# Altium PCB MainShunt.PcbDoc
Units mm, origin at the board's own origin, x right, y up, seen from the top; angles counter-clockwise.
Board outline 74.99 x 50.01 mm, 4 copper layers (Top Layer, Layer 1, Layer 2, Bottom Layer), stack 0.637 mm thick; 43 components, 38 nets, 202 pads, 18 vias.
Unrouted connection lines stored in the file: 58.
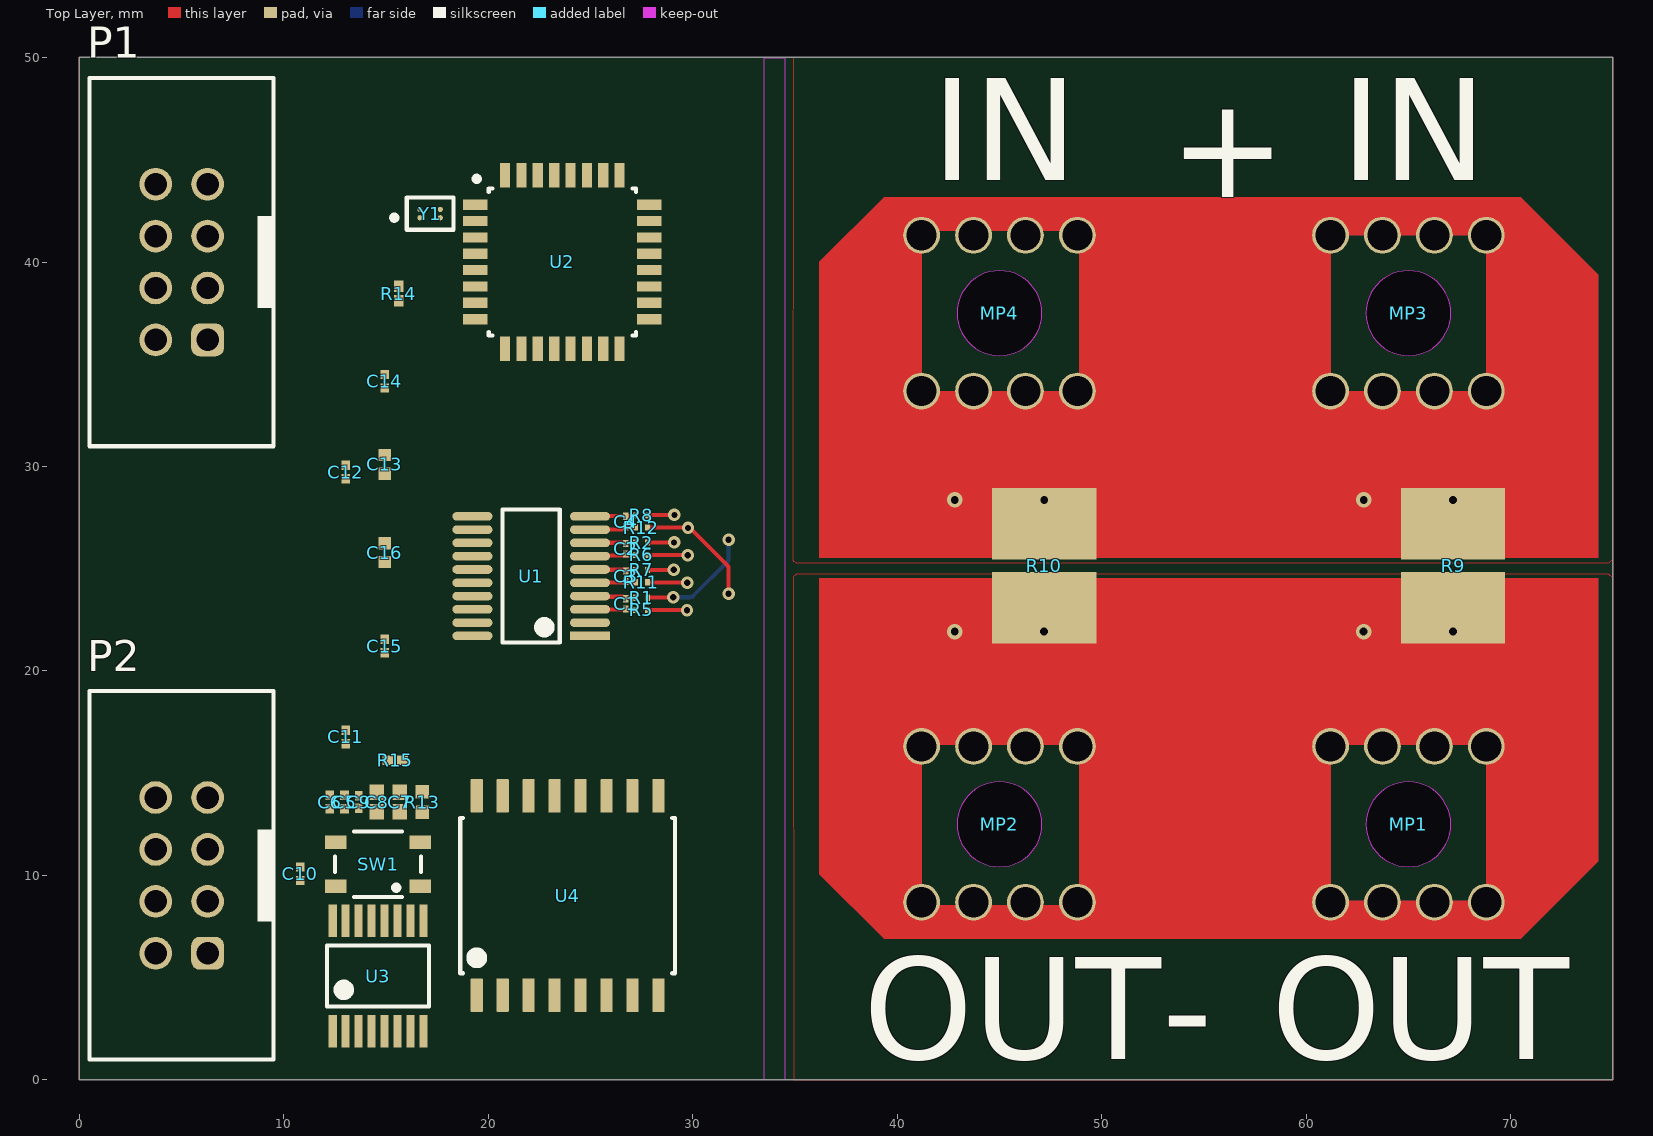
[diagram p0: Top Layer view]
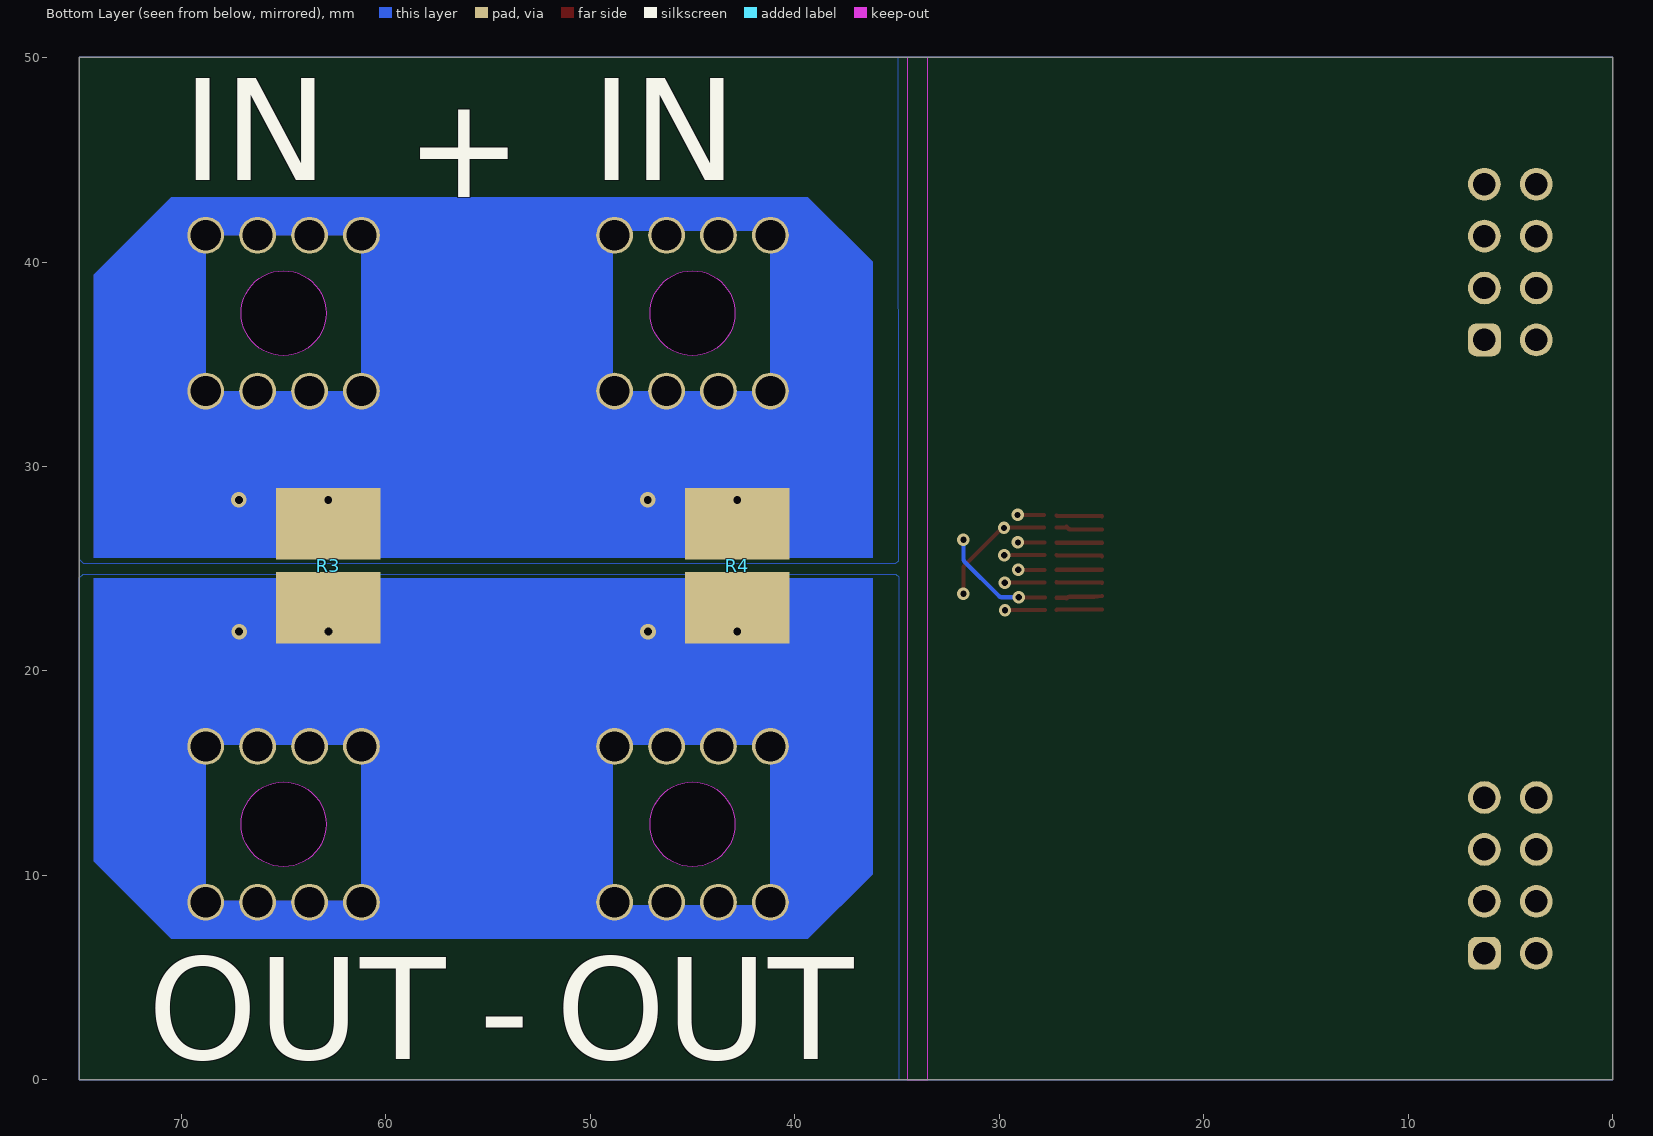
[diagram p1: Bottom Layer view, seen from below]
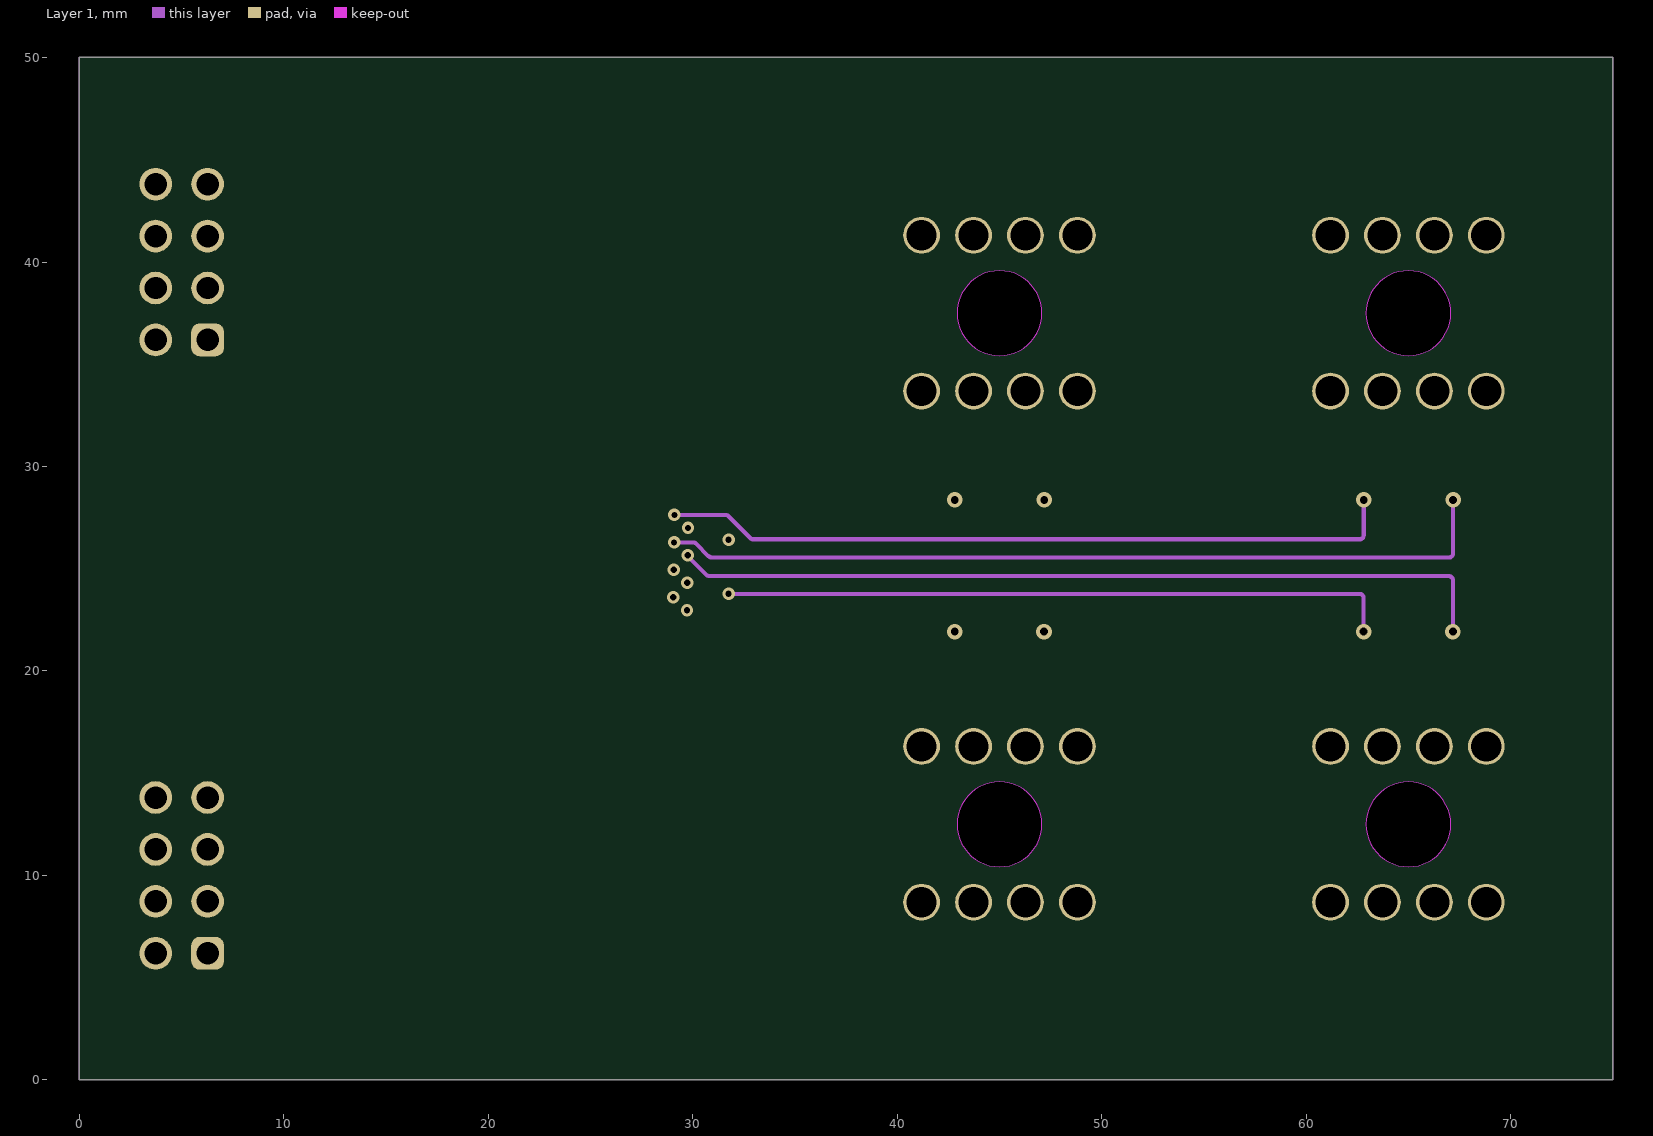
[diagram p2: Layer 1]
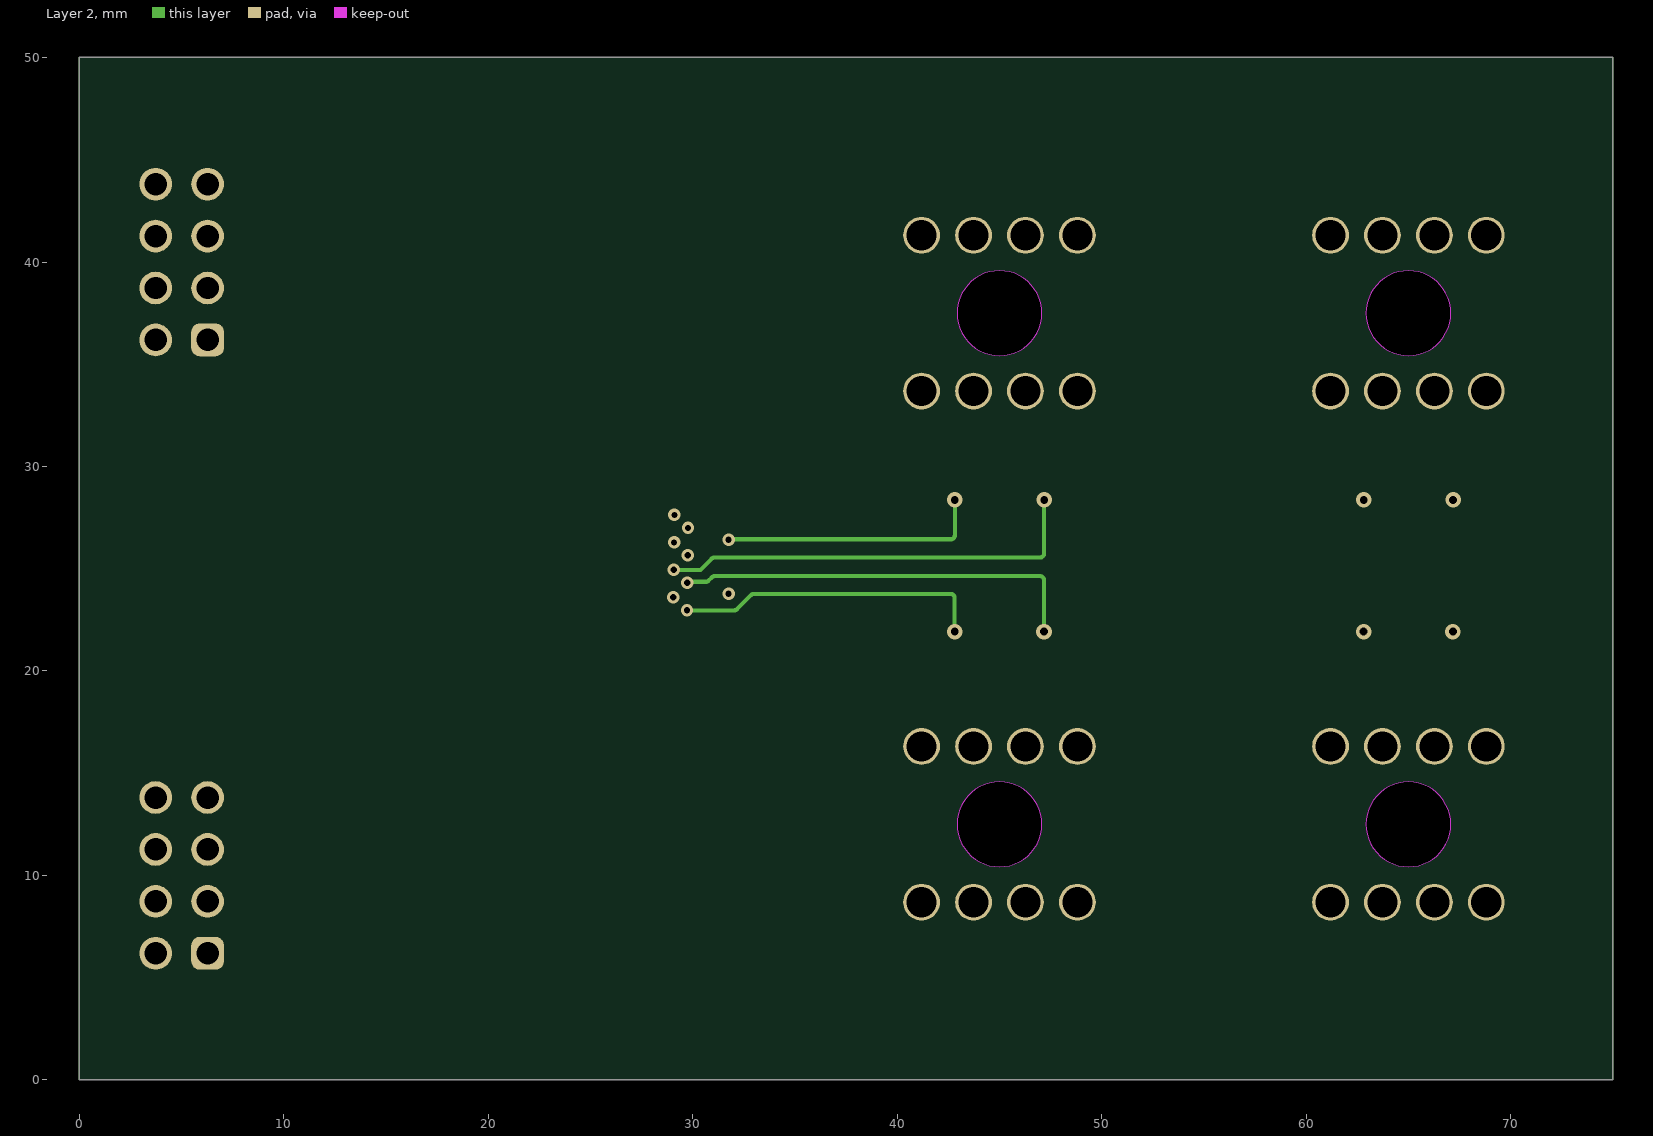
[diagram p3: Layer 2]

## Layer stack, top to bottom
Top Solder: solder mask 0.0102, Solder Resist, Dk 3.5
Top Layer: signal copper 0.07
Dielectric 2: prepreg 0.0711, PP-006, Dk 4.1
Layer 1: signal copper 0.0175
Dielectric 1: dielectric 0.32, FR-4, Dk 4.8
Layer 2: signal copper 0.0175
Dielectric 3: prepreg 0.0711, PP-006, Dk 4.1
Bottom Layer: signal copper 0.07
Bottom Solder: solder mask 0.0102, Solder Resist, Dk 3.5

## Board outline
0,0 74.986,0 74.986,50.005 0,50.005
cut-out: 42.925,12.5 ccw(c45,12.5) 45,10.425 ccw(c45,12.5) 47.075,12.5 ccw(c45,12.5) 45,14.575 ccw(c45,12.5)
cut-out: 62.925,12.5 ccw(c65,12.5) 65,10.425 ccw(c65,12.5) 67.075,12.5 ccw(c65,12.5) 65,14.575 ccw(c65,12.5)
cut-out: 62.925,37.5 ccw(c65,37.5) 65,35.425 ccw(c65,37.5) 67.075,37.5 ccw(c65,37.5) 65,39.575 ccw(c65,37.5)
cut-out: 42.925,37.5 ccw(c45,37.5) 45,35.425 ccw(c45,37.5) 47.075,37.5 ccw(c45,37.5) 45,39.575 ccw(c45,37.5)

## Design rules (kind name [scope] priority, off if disabled: settings)
Clearance [All] p1: gap=0.203 ignorepadtopadclearanceinfootprint=TRUE except(0: Arc-Hole Track-Hole SMDPad-Hole THPad-Hole Via-Hole Fill-Hole Poly-Hole Region-Hole Text-Hole)
ComponentClearance [All] p1: gap=0 collisioncheckmode=3 verticalgap=0.254 showdistances=FALSE
PolygonConnect [All] p1: connectstyle=Relief reliefconductorwidth=0.254 reliefentries=4 polygonreliefangle="90 Angle" airgapwidth=0.254
RoutingVias [All] p1: holewidth=0.305 width=0.61 viastyle="Through Hole" minholewidth=0.279 minwidth=0.559 maxholewidth=1.016 maxwidth=2.032
SolderMaskExpansion [All] p1: expansion=0.102 istentingtop=FALSE
SupplyNets "Schematic Supply Nets_5" [InNet('5V')] p1: voltage=0.000
SupplyNets "Schematic Supply Nets_4" [InNet('ISO_3V3')] p2: voltage=0.000
SupplyNets "Schematic Supply Nets_3" [InNet('Vcc-1')] p3: voltage=0.000
SupplyNets "Schematic Supply Nets_2" [InNet('ISO_GND')] p4: voltage=0.000
SupplyNets "Schematic Supply Nets_1" [InNet('GND')] p5: voltage=0.000
SupplyNets "Schematic Supply Nets" [InNet('Vcc-2')] p6: voltage=0.000
Width [All] p1: maxlimit=6.35 minlimit=0.165 preferedwidth=0.203
29 further rules are at their usual default settings.

## Classes and differential pairs
component class ISO_SPI: C11 C12 U3
component class ISO_5V: C13 C14 C15 C16 R14 R15 U4
component class MainShunt: C1 C2 C3 C4 C5 C6 C7 C8 C9 C10 MP1 MP2 MP3 MP4 P1 P2 R1 R2 R3 R4 R5 R6 R7 R8 R9 R10 R11 R12 R13 SW1 U1 U2 Y1

## Components (designator, comment, footprint, x,y, rotation, side; value= is the part's Value field where it differs from the comment)
C1 "10nF, 25V, X5R, 0201" FP-GRM033-0_03-IPC_C 26.716,23.283 r270 top
C2 "10nF, 25V, X5R, 0201" FP-GRM033-0_03-IPC_C 26.716,25.975 r270 top
C3 "10nF, 25V, X5R, 0201" FP-GRM033-0_03-IPC_C 26.716,24.638 r270 top
C4 "10nF, 25V, X5R, 0201" FP-GRM033-0_03-IPC_C 26.716,27.31 r270 top
C5 "100 nF, 25V, X6S, 0201" CAPC0603X33N 12.967,13.589 r270 top
C6 "100 nF, 25V, X6S, 0201" CAPC0603X33N 12.247,13.589 r270 top
C7 "1uF, 25V, X6S, 0402" FP-GRT155-0_1-IPC_A 15.658,13.589 r270 top
C8 "1uF, 25V, X6S, 0402" FP-GRT155-0_1-IPC_A 14.546,13.589 r270 top
C9 "220nF, 25V, X6S, 0402" FP-C0603-030-0_03-IPC_B 13.658,13.589 r270 top
C10 "100 nF, 25V, X6S, 0201" CAPC0603X33N 10.795,10.084 r270 top
C11 "100 nF, 25V, X6S, 0201" CAPC0603X33N 13.032,16.772 r90 top
C12 "100 nF, 25V, X6S, 0201" CAPC0603X33N 13.032,29.726 r90 top
C13 "10 uF, 25V, X6S, 0402" CAPC1005X70N 14.937,30.107 r90 top
C14 "100 nF, 25V, X6S, 0201" CAPC0603X33N 14.937,34.171 r90 top
C15 "100 nF, 25V, X6S, 0201" CAPC0603X33N 14.937,21.217 r90 top
C16 "10 uF, 25V, X6S, 0402" CAPC1005X70N 14.937,25.789 r90 top
MP1 "7460307" "7460307_CHEMICAL SURFACE" 65,12.5 r0 top
MP2 "7460307" "7460307_CHEMICAL SURFACE" 45,12.5 r0 top
MP3 "7460307" "7460307_CHEMICAL SURFACE" 65,37.5 r0 top
MP4 "7460307" "7460307_CHEMICAL SURFACE" 45,37.5 r0 top
P1 "61200821621" 61200821621 5,40 r90 top
P2 "61200821621" 61200821621 5,10 r90 top
R1 "1K 1%, 0201" ERJ1GN_(0201) 27.49,23.583 r0 top
R2 "1K 1%, 0201" ERJ1GN_(0201) 27.49,26.275 r0 top
R3 "2mOhm 1%, 2818" FP-WSHP2818-MFG 62.815,25.146 r90 bottom
R4 "2mOhm 1%, 2818" FP-WSHP2818-MFG 42.815,25.146 r90 bottom
R5 "1K 1%, 0201" ERJ1GN_(0201) 27.49,22.983 r0 top
R6 "1K 1%, 0201" ERJ1GN_(0201) 27.49,25.675 r0 top
R7 "1K 1%, 0201" ERJ1GN_(0201) 27.49,24.938 r0 top
R8 "1K 1%, 0201" ERJ1GN_(0201) 27.49,27.61 r0 top
R9 "2mOhm 1%, 2818" FP-WSHP2818-MFG 67.185,25.146 r90 top
R10 "2mOhm 1%, 2818" FP-WSHP2818-MFG 47.185,25.146 r90 top
R11 "1K 1%, 0201" ERJ1GN_(0201) 27.49,24.338 r0 top
R12 "1K 1%, 0201" ERJ1GN_(0201) 27.49,27.01 r0 top
R13 "10K 5%, 0402" RESC1005X40X25ML05T05 16.764,13.589 r270 top
R14 "RSVD" FP-ERJ1GN-IPC_A 15.621,38.454 r90 top
R15 "100K 1%, 0201" FP-ERJ1GN-IPC_A 15.445,15.629 r180 top
SW1 "PTS810SJM250SMTRLFS" FP-PTS810SJM250SMTRLFS-MFG 14.605,10.541 r180 top
U1 "ADS131M04IPWR" FP-PW0020A-IPC_A 22.098,24.638 r180 top
U2 "STM32L010K4T6" FP-LQFP32-5V-MFG 23.622,40.005 r0 top
U3 "ISO7741DBQR" FP-DBQ0016A-MFG 14.605,5.08 r90 top
U4 "UCC12040DVER" FP-DVE0016A-MFG 23.876,9.017 r90 top
Y1 "SIT1552AC-JE-DCC-32.768D" FP-SIT1552-J-MFG 17.153,42.369 r0 top

## Footprints (in the part's own frame and the unit in brackets; to place one, negate y for a bottom-side part, rotate by r counter-clockwise, add the part's x,y. Pads: shape width x height; smd on the part's side, far side on the other; paste and mask are expansions set on the pad)
"7460307_CHEMICAL SURFACE" [mm] "WP-BUTR Bushes with two Rows Pin-Plate, M4, blind thr 6mm"
  round 1.8 hole 1.475: 1(-3.81,-3.81) 1(-3.81,3.81) 1(-1.27,-3.81) 1(-1.27,3.81) 1(1.27,-3.81) 1(1.27,3.81) 1(3.81,-3.81) 1(3.81,3.81)
  body extent -4.5,-4.5 4.5,4.5, height 7
61200821621 [mm] "8 pins, straight, gold plating"
  rrect50% 1.6x1.6 hole 1.1: 1(-3.81,-1.27)
  round 1.6 hole 1.1: 2(-3.81,1.27) 3(-1.27,-1.27) 4(-1.27,1.27) 5(1.27,-1.27) 6(1.27,1.27) 7(3.81,-1.27) 8(3.81,1.27)
  silkscreen extent -9.01,-4.5 9.01,4.5, body extent -8.91,-4.42 8.91,4.75, height 9.13
CAPC0603X33N [mm]
  rect 0.46x0.42 smd: 1(-0.33,0) 2(0.33,0)
  body extent -0.3,-0.15 0.3,0.15, height 0.33
CAPC1005X70N [mm]
  rect 0.6x0.62 smd: 1(-0.46,0) 2(0.46,0)
  body extent -0.5,-0.25 0.5,0.25, height 0.5
ERJ1GN_(0201) [mm]
  rect 0.25x0.3 smd: 1(-0.3,0) 2(0.3,0)
  body extent -0.3,-0.15 0.3,0.15, height 0.23
FP-C0603-030-0_03-IPC_B [mm]
  rect 0.456x0.363 smd paste+0 mask+0: 1(-0.303,0) 2(0.303,0)
  body extent -0.68,-0.33 0.68,0.33, height 0.25
FP-DBQ0016A-MFG [mm]
  rect 1.6x0.41 smd paste+0 mask+0: 1(-2.7,2.223) 2(-2.7,1.588) 3(-2.7,0.953) 4(-2.7,0.318) 5(-2.7,-0.317) 6(-2.7,-0.952) 7(-2.7,-1.588) 8(-2.7,-2.222) 9(2.7,-2.222) 10(2.7,-1.587) 11(2.7,-0.952) 12(2.7,-0.317) 13(2.7,0.318) 14(2.7,0.953) 15(2.7,1.588) 16(2.7,2.223)
  silkscreen extent -1.5,-2.5 1.5,2.5, body extent -3.6,-2.75 3.6,2.75, height 0.25
FP-DVE0016A-MFG [mm]
  rrect17% 1.65x0.6 smd paste+0 mask+0: 1(-4.875,4.445) 2(-4.875,3.175) 3(-4.875,1.905) 4(-4.875,0.635) 5(-4.875,-0.635) 6(-4.875,-1.905) 7(-4.875,-3.175) 8(-4.875,-4.445) 9(4.875,-4.445) 10(4.875,-3.175) 11(4.875,-1.905) 12(4.875,-0.635) 13(4.875,0.635) 14(4.875,1.905) 15(4.875,3.175) 16(4.875,4.445)
  silkscreen extent -3.8,-5.25 3.8,5.25, body extent -5.8,-5.5 5.8,5.5, height 0.25
FP-ERJ1GN-IPC_A [mm]
  rect 0.554x0.463 smd paste+0 mask+0: 1(-0.354,0) 2(0.354,0)
  body extent -0.83,-0.43 0.83,0.43, height 0.25
FP-GRM033-0_03-IPC_C [mm]
  rect 0.354x0.263 smd paste+0 mask+0: 1(-0.254,0) 2(0.254,0)
  body extent -0.53,-0.26 0.53,0.27, height 0.25
FP-GRT155-0_1-IPC_A [mm]
  rect 0.76x0.712 smd paste+0 mask+0: 1(-0.476,0) 2(0.476,0)
  body extent -1.06,-0.56 1.06,0.56, height 0.25
FP-LQFP32-5V-MFG [mm]
  rect 1.2x0.5 smd paste+0 mask+0: 1(-4.25,2.8) 2(-4.25,2) 3(-4.25,1.2) 4(-4.25,0.4) 5(-4.25,-0.4) 6(-4.25,-1.2) 7(-4.25,-2) 8(-4.25,-2.8) 17(4.25,-2.8) 18(4.25,-2) 19(4.25,-1.2) 20(4.25,-0.4) 21(4.25,0.4) 22(4.25,1.2) 23(4.25,2) 24(4.25,2.8)
  rect 0.5x1.2 smd paste+0 mask+0: 9(-2.8,-4.25) 10(-2,-4.25) 11(-1.2,-4.25) 12(-0.4,-4.25) 13(0.4,-4.25) 14(1.2,-4.25) 15(2,-4.25) 16(2.8,-4.25) 25(2.8,4.25) 26(2,4.25) 27(1.2,4.25) 28(0.4,4.25) 29(-0.4,4.25) 30(-1.2,4.25) 31(-2,4.25) 32(-2.8,4.25)
  silkscreen extent -4.32,-3.6 3.6,4.19, body extent -4.95,-4.95 4.95,4.95, height 0.25
FP-PTS810SJM250SMTRLFS-MFG [mm]
  rect 1.05x0.65 smd paste+0 mask+0: 1(-2.075,1.075) 2(2.075,1.075) 3(-2.075,-1.075) 4(2.075,-1.075)
  silkscreen extent -2.1,-1.6 2.1,1.6, body extent -2.7,-1.7 2.7,1.7, height 0.25
FP-PW0020A-IPC_A [mm]
  rect 1.955x0.421 smd paste+0 mask+0: 1(-2.875,2.925)
  rrect100% 1.955x0.421 smd paste+0 mask+0: 2(-2.875,2.275) 3(-2.875,1.625) 4(-2.875,0.975) 5(-2.875,0.325) 6(-2.875,-0.325) 7(-2.875,-0.975) 8(-2.875,-1.625) 9(-2.875,-2.275) 10(-2.875,-2.925) 11(2.875,-2.925) 12(2.875,-2.275) 13(2.875,-1.625) 14(2.875,-0.975) 15(2.875,-0.325) 16(2.875,0.325) 17(2.875,0.975) 18(2.875,1.625) 19(2.875,2.275) 20(2.875,2.925)
  silkscreen extent -1.4,-3.25 1.4,3.25, body extent -4.35,-3.75 4.35,3.75, height 0.25
FP-SIT1552-J-MFG [mm]
  round 0.25 smd paste+0 mask-1000: 1(-0.5,-0.205) 2(0.5,-0.205) 3(0.5,0.205) 4(-0.5,0.205)
  silkscreen extent -1.87,-0.79 1.14,0.79, body extent -1.29,-0.94 1.29,0.94, height 0.25
FP-WSHP2818-MFG [mm]
  rect 3.5x5.1 smd paste+0 mask+0: 1(-2.055,0) 2(2.055,0)
  body extent -3.55,-2.3 3.55,2.3, height 1.75
RESC1005X40X25ML05T05 [mm] "Chip Resistor, 2-Leads, Body 1.00x0.50mm, IPC Low Density"
  rect 0.65x0.65 smd: 1(-0.5,0) 2(0.5,0)
  body extent -0.53,-0.27 0.53,0.28, height 0.4

## Part data
C1 C2 C3 C4: library part CMP-2010-01269-2, "Chip Multilayer Ceramic Capacitors for General Purpose, 0201, 10000pF, X5R, 15%, 10%, 25V", Capacitance=10nF, Case Code (Imperial)=0201, Case Code (Metric)=0603, Dielectric=X5R, Max Operating Temperature=85°C, Min Operating Temperature=-55°C, Package Quantity=15000, Tolerance=10%, Voltage=25V, Case/Package=0201, Depth=0.3mm, Height=0.3mm, Lead Free="Lead Free", Length=0.6mm, Mount="Surface Mount", Packaging="Tape and Reel", REACH SVHC="No SVHC", Termination=SMD/SMT, Thickness=0.013inch, Voltage Rating=25V, Voltage Rating (DC)=25V, Weight=1.2E-05oz, Width=0.3mm
C5 C6 C10 C11 C12 C14 C15: library part GRM033C81E104KE14D, "Capacitor", Manufacturer_Name="Murata Electronics", Mouser Part Number=81-GRM33C81E104KE14D, Arrow Part Number=GRM033C81E104KE14D, Arrow Price/Stock=https://www.arrow.com/en/products/grm033c81e104ke14d/murata-manufacturing, Datasheet Link=https://search.murata.co.jp/Ceramy/image/img/A01X/G101/ENG/GRM033C81E104KE14-01A.pdf, Height=0.33mm, Manufacturer_Part_Number=GRM033C81E104KE14D, Mouser Price/Stock=https://www.mouser.co.uk/ProductDetail/Murata-Electronics/GRM033C81E104KE14D?qs=P%2FC4Eoq9CDwxe7d5nXqGrA%3D%3D
C7 C8: library part CMP-06035-047663-1, "Multi-Layer Ceramic Capacitor 1uF 25V X6S ±10% 0402 Paper T/R"
C9: library part CMP-08246-006007-1, "Multilayer Ceramic Capacitors 22nF ±10% 25V X5R SMD 0201", Capacitance=22nF, Case Code (Imperial)=0201, Case Code (Metric)=0603, Dielectric=X5R, Dielectric Material=Ceramic, Max Operating Temperature=85°C, Min Operating Temperature=-55°C, Package Quantity=15000, Tolerance=10%, Voltage Rating=25V, Case/Package=0201, Height=0.3mm, Lead Free="Lead Free", Length=0.024inch, Mount="Surface Mount", Packaging="Tape and Reel", RoHS Compliant=Yes, Series=C, Termination=SMD/SMT, Thickness=0.013inch, Voltage Rating (DC)=25V, Weight=6E-06oz, Width=0.3mm
C13 C16: library part GRM155F51E104ZA01E, "Capacitor", Manufacturer_Name="Murata Electronics", Mouser Part Number=81-GRM15F51E104ZA01E, Datasheet Link=http://www.murata.com/~/media/webrenewal/support/library/catalog/products/capacitor/mlcc/c02e.pdf, Height=0.7mm, Manufacturer_Part_Number=GRM155F51E104ZA01E, Mouser Price/Stock=https://www.mouser.com/Search/Refine.aspx?Keyword=81-GRM15F51E104ZA01E
MP1 MP2 MP3 MP4: library part CMP-03913-18187384-1, "7460307 8 Pin Power Element, Copper Zinc Alloy, 160A, M4, Vertical", Current Rating=160A, Max Operating Temperature=150°C, Min Operating Temperature=-55°C, Contact Material=Copper, Contact Plating=Tin, Height=10.5mm, Insulation=Non-Insulated, Length=9mm, Material=Brass, Mount="Through Hole", NexarPartId=18187384, Number of Contacts=8, Number of Pins=8, Number of Rows=2, Packaging=Bulk, REACH SVHC=Unknown, RoHS=Compliant, Termination=Press-Fit, Thread Size=M4, Width=9mm
P1 P2: library part CMP-1502-00006-2, Color=Black, Contact Resistance=20mΩ, Current Rating=3A, Insulation Resistance=1GΩ, Max Operating Temperature=105°C, Min Operating Temperature=-40°C, Operating Supply Voltage=250V, Connector Type="Male Pin", Contact Material=Copper, Contact Plating=Gold, Gender=Male, Insulation Material=PBT, Lead Pitch=2.54mm, Length=17.82mm, Mount="Through Hole", NexarPartId=32855460, Number of Contacts=8, Number of Pins=8, Number of Positions=8, Number of Rows=2, Orientation=Vertical, Pitch=2.54mm, REACH SVHC=Unknown, RoHS=Compliant, Row Spacing=2.54mm, Termination=Solder
R1 R2 R5 R6 R7 R8 R11 R12: library part ERJ-1GNF1001C, "Resistor", Manufacturer_Name=Panasonic, Mouser Part Number=667-ERJ-1GNF1001C, Arrow Part Number=ERJ-1GNF1001C, Arrow Price/Stock=https://www.arrow.com/en/products/erj-1gnf1001c/panasonic?utm_currency=USD&region=nac, Datasheet Link=https://industrial.panasonic.com/cdbs/www-data/pdf/RDA0000/AOA0000C301.pdf, Height=0.26mm, Manufacturer_Part_Number=ERJ-1GNF1001C, Mouser Price/Stock=https://www.mouser.co.uk/ProductDetail/Panasonic/ERJ-1GNF1001C?qs=nuXzIS8loXFEaL2ux1uJzQ%3D%3D
R3 R4 R9 R10: library part CMP-00030-78727543-1, "WSHP28182L000FEB Res Metal Strip 2818 0.002 Ohm 1% 10W ±200ppm/C Pad SMD Automotive T/R", Case/Package=2818, Max Operating Temperature=170°C, Min Operating Temperature=-65°C, Power Rating=10W, Resistance=2mΩ, Temperature Coefficient=200ppm/°C, Tolerance=1%, Composition="Metal Element", Height=3.43mm, NexarPartId=78727543, Packaging="Cut Tape", RoHS=Non-Compliant, Schedule B="8533210045, 8533210045"
R13: library part CMP-2002-00433-1, Manufacturer=Panasonic, Part Number=ERJ-2GEJ103X
R14 R15: library part CMP-2004-03446-2, "RES SMD 100K OHM 1% 1/20W 0201", Case Code (Imperial)=0201, Case Code (Metric)=0603, Max Operating Temperature=125°C, Max Power Dissipation=50mW, Min Operating Temperature=-55°C, Package Quantity=15000, Resistance=100kR, Temperature Coefficient=200ppm/°C, Tolerance=1%, Voltage Rating=25V, Case/Package=0201, Composition="Thick Film", Contact Plating=Tin, Height=0.01inch, Lead Free="Lead Free", Length=0.024inch, Mount="Surface Mount", Number of Pins=2, Number of Terminations=2, Packaging="Tape and Reel", Power Rating=50mW, Radiation Hardening=No, REACH SVHC="No SVHC", Termination=SMD/SMT, Voltage Rating (DC)=25V, Weight=6E-06oz, Width=0.012inch
SW1: library part CMP-10040-000001-2, "SWITCH TACTILE SPST-NO 0.05A 16V", Case/Package=SMD/SMT, Color=Black, Current Rating=50mA, Max Operating Temperature=85°C, Min Operating Temperature=-40°C, Operating Force=160gf, Package Quantity=2900, Voltage Rating (DC)=16V, Actuator Type=Standard, Contact Plating=Silver, Depth=4.6mm, Illumination Type=Non-Illuminated, Lead Free="Lead Free", Length=3.2mm, Max Current Rating=50mA, Mechanical Life=150000Cycles, Mount="Surface Mount", Orientation=Straight, Packaging="Tape and Reel", RoHS Compliant=Yes, Switch Function=Off-Mom, Switch Travel=0.15mm, Termination=J-Bend, Throw Configuration=SPST
U1: library part CMP-04860-000051-1, "IC ADC 24BIT SIGMA-DELTA 20TSSOP"
U2: library part CMP-12105-000001-1, "16/32-BITS MICROS", Ambient Temperature Range High=+85°C, Ambient Temperature Range Low=-40°C, Frequency=32MHz, Manufacturer=STMicroelectronics, Max Junction Temp=+105°C, Max Supply Voltage=3.6V, Min Supply Voltage=1.8V, Nominal Supply Current=22-5400uA, Package=LQFP32-5V, Temperature="-40°C to +85°C", Automotive=No, Category=IC, ComponentLink2Description=Datasheet, ComponentLink2URL=https://www.st.com/resource/en/datasheet/stm32l010f4.pdf, Core Architecture="ARM Cortex-M0+", Data Bus Width=32bits, Device Class L1="Integrated Circuits (ICs)", Device Class L2="Embedded Processors and Controllers", Device Class L3=Microcontrollers, Digikey Description="16/32-BITS MICROS", Height=1.6mm, Interface=I2C,SPI,UART,USART,SMBus, Lead Free=Yes, Manufacturer Part Number=STM32L010K4T6, Memory Size=16KBytes, Memory Type=FLASH, Number Of A/D Converters=1, Number Of Adc Channels=10, Number Of Cores=1, Number Of I2C Channels=1, Number Of I/Os=26, Number Of Spi Channels=1, Number Of Timers/Counters=5, Number Of Uart Channels=2, Octopart=https://octopart.com/stm32l010k4t6-stmicroelectronics-96493833, Ram Size=2KBytes, RoHS=TRUE, Standoff Height=0.05mm, Temperature Range High=+85°C, Temperature Range Low=-40°C
U3: library part CMP-04872-000008-1, Ambient Temperature Range High=+125°C, Ambient Temperature Range Low=-55°C, Manufacturer="Texas Instruments", Max Junction Temp=+150°C, Max Supply Voltage=5.5V, Min Supply Voltage=2.25V, Nominal Supply Current=0.8-18mA, Package=DBQ0016A, Temperature="-55°C to +125°C", Automotive=No, Category=IC, ComponentLink2Description=Datasheet, ComponentLink2URL=http://www.ti.com/lit/ds/symlink/iso7741.pdf, Device Class L1="Integrated Circuits (ICs)", Device Class L2="Interface ICs", Device Class L3=unset, Digikey Description=ISO7741DBQR, Height=1.75mm, Interface=SPI, Lead Free=Yes, Manufacturer Part Number=ISO7741DBQR, Mouser Description="High-speed, low-power, robust EMC quad-channel digital isolator 16-SSOP -55 to 125", Octopart=https://octopart.com/iso7741dbqr-texas+instruments-82338409, RoHS=TRUE, Standoff Height=0.11mm, Temperature Range High=+125°C, Temperature Range Low=-55°C
U4: library part CMP-04910-000064-1, "DC DC CONVERTER 3.3V 5V 500MW"
Y1: library part CMP-25159-260295-1, "MEMS OSC TCXO 32.7680KHZ LVCMOS", Frequency=32.768kHz, Frequency Stability=5ppm, Max Operating Temperature=70°C, Min Operating Temperature=0°C, Height=0.024inch, Length=0.061inch, Mount="Surface Mount", Packaging="Cut Tape", RoHS Compliant=Yes, Series=SiT1552, Width=0.033inch

## Via types
v1: diameter 0.61, hole 0.305, Top Layer to Bottom Layer, tented both sides, 10 vias
v2: diameter 0.762, hole 0.381, Top Layer to Bottom Layer, 8 vias

## Nets (pads, with @x,y where several pads share a name; then routed paths per layer and width w, separated by ;. In a path a pad name is that pad's centre, name@x,y a point inside that pad or via, vN(x,y) a via of type N, cw(c..) or ccw(c..) an arc to the next point about the centre after c; other vN are vias at no path point)
5V: C13.2 C14.2 P1.7 P1.8 P2.7 P2.8 R15.2 U4.3
Ain0n: C1.2 R5.1 U1.3 | length 2.2
  Top Layer w0.203: U1.3 24.989,22.998 27.175,22.998 R5.1
Ain0p: C1.1 R1.1 U1.4 | length 2.2
  Top Layer w0.203: U1.4 25.361,23.629 ccw(c25.366,23.833) 25.366,23.629 26.539,23.629 cw(c26.539,23.426) 26.683,23.57 26.686,23.567 C1.1 ; C1.1@26.716,23.583 R1.1
Ain1n: C3.2 R11.1 U1.5 | length 2.2
  Top Layer w0.203: U1.5 24.986,24.326 27.177,24.326 R11.1
Ain1p: C3.1 R7.1 U1.6 | length 2.2
  Top Layer w0.203: U1.6 24.986,24.951 27.178,24.951 R7.1
Ain2n: C2.2 R6.1 U1.7 | length 2.2
  Top Layer w0.203: U1.7 25.005,25.644 27.167,25.644 27.19,25.668 R6.1
Ain2p: C2.1 R2.1 U1.8 | length 2.2
  Top Layer w0.203: U1.8 24.98,26.269 27.184,26.269 R2.1
Ain3n: C4.2 R12.1 U1.9 | length 2.3
  Top Layer w0.203: U1.9 24.981,26.913 cw(c25.034,26.717) 25.034,26.92 26.497,26.92 ccw(c26.497,27.123) 26.64,26.979 C4.2 ; C4.2@26.716,27.01 R12.1
Ain3p: C4.1 R8.1 U1.10 | length 2.2
  Top Layer w0.203: U1.10 24.997,27.586 27.167,27.586 R8.1
CAP: C9.1 U1.18
GND: C10.2 C11.2 C13.1 C14.1 P1.1 P1.2 P2.1 P2.2 SW1.1 SW1.2 U2.16 U2.32 U3.2 U3.8 U4.2 U4.6 U4.7 U4.8 Y1.1 Y1.4
IN: MP3.1 MP4.1 R1.2 R2.2 R3.2 R4.2 R7.2 R8.2 R9.2 R10.2 | length 120.7
  Top Layer w0.203: R1.2@27.764,23.594 v1@29.043,23.594 ; R7.2@27.78,24.938 v1@29.059,24.938 ; R2.2 27.797,26.282 29.076,26.282 v1(29.083,26.289) ; R8.2@27.814,27.626 v1@29.093,27.626
  Layer 1 w0.2: v1(29.083,26.289) 30.016,26.289 cw(c30.016,26.089) 30.136,26.249 cw(c30.016,26.089) 30.157,26.231 30.779,25.609 ccw(c30.92,25.751) 30.8,25.591 ccw(c30.92,25.751) 30.92,25.551 32.766,25.551 66.985,25.551 ccw(c66.985,25.751) 67.185,25.751 v2(67.185,28.368) ; v1(29.1,27.633) 31.593,27.633 cw(c31.593,27.433) 31.713,27.593 cw(c31.593,27.433) 31.735,27.574 32.812,26.497 ccw(c32.952,26.64) 32.951,26.44 62.615,26.44 ccw(c62.615,26.64) 62.815,26.64 v2(62.815,28.368)
  Layer 2 w0.2: v1(29.066,24.945) 30.382,24.945 30.93,25.493 cw(c31.071,25.351) 30.951,25.511 cw(c31.071,25.351) 31.071,25.551 46.985,25.551 ccw(c46.985,25.751) 47.185,25.751 v2(47.185,28.368) ; v1@31.75,26.44 42.615,26.44 ccw(c42.615,26.64) 42.815,26.64 v2(42.815,28.368)
  Bottom Layer w0.203: v1(29.05,23.601) 29.867,23.601 ccw(c29.867,23.804) 29.989,23.642 ccw(c29.867,23.804) 30.01,23.66 31.691,25.341 ccw(c31.547,25.484) 31.709,25.362 ccw(c31.547,25.484) 31.75,25.484 v1(31.75,26.416)
ISO-CLK: U1.14
ISO-DRDY: U1.13
ISO-MasterCLK: U1.17
ISO-MISO: U1.15
ISO-MOSI: U1.16
ISO-SYNC: U1.11
ISO_GND: C5.2 C6.2 C7.2 C8.2 C9.2 C12.2 C15.2 C16.2 R14.2 U1.2 U1.19 U3.9 U3.15 U4.9 U4.10 U4.11 U4.12 U4.15 U4.16
LSE_RTC: U2.2 Y1.2
NetR14_1: R14.1 U4.13
NetR15_1: R15.1 U4.5
NetU3_3: U3.3
NetU3_4: U3.4
NetU3_5: U3.5
NetU3_6: U3.6
NetU3_11: U3.11
NetU3_12: U3.12
NetU3_13: U3.13
NetU3_14: U3.14
NetU4_1: U4.1
NetU4_4: U4.4
NRST: C10.1 R13.2 SW1.3 SW1.4 U2.4
OUT: MP1.1 MP2.1 R3.1 R4.1 R5.2 R6.2 R9.1 R10.1 R11.2 R12.2 | length 120.5
  Top Layer w0.203: R5.2@27.768,22.977 v1@29.706,22.977 ; R11.2@27.784,24.321 v1@29.723,24.321 ; R6.2 27.801,25.665 29.739,25.665 v1(29.75,25.654) ; R12.2@27.817,27.009 v1@29.756,27.009 ; v1(29.767,26.998) 29.858,26.998 31.69,25.165 cw(c31.547,25.021) 31.75,25.021 v1(31.75,23.773)
  Layer 1 w0.2: v1@29.766,25.606 30.676,24.696 ccw(c30.817,24.838) 30.815,24.638 32.766,24.638 66.978,24.638 cw(c66.978,24.438) 67.178,24.44 cw(c66.978,24.438) 67.178,24.438 v2(67.178,21.926) ; v1(31.75,23.773) 62.608,23.773 cw(c62.608,23.573) 62.808,23.574 cw(c62.608,23.572) 62.808,23.573 v2(62.808,21.926)
  Layer 2 w0.2: v1(29.717,22.966) 32.027,22.966 ccw(c32.027,23.166) 32.147,23.006 ccw(c32.027,23.166) 32.168,23.024 32.859,23.715 cw(c33,23.573) 32.88,23.733 cw(c33,23.573) 33,23.773 42.608,23.773 cw(c42.608,23.573) 42.808,23.574 cw(c42.608,23.572) 42.808,23.573 v2(42.808,21.926) ; v1(29.733,24.31) 29.785,24.362 30.629,24.362 ccw(c30.629,24.562) 30.749,24.402 ccw(c30.629,24.562) 30.77,24.42 30.93,24.58 cw(c31.071,24.438) 30.951,24.598 cw(c31.071,24.438) 31.071,24.638 46.978,24.638 cw(c46.978,24.438) 47.178,24.44 cw(c46.978,24.438) 47.178,24.438 v2(47.178,21.926)
SCL-MOSI: P1.5 P1.6 P2.5 P2.6
SDA-MOSI: P1.3 P1.4 P2.3 P2.4
Vcc-1: C11.1 R13.1 U2.1 U2.5 U2.17 U3.1 U3.7 Y1.3
Vcc-2: C5.1 C6.1 C7.1 C8.1 C12.1 C15.1 C16.1 U1.1 U1.12 U1.20 U3.10 U3.16 U4.14
pads on no net: U2.3 U2.6 U2.7 U2.8 U2.9 U2.10 U2.11 U2.12 U2.13 U2.14 U2.15 U2.18 U2.19 U2.20 U2.21 U2.22 U2.23 U2.24 U2.25 U2.26 U2.27 U2.28 U2.29 U2.30 U2.31

## Polygon pours and split planes (outlines as drawn)
GND on Top Layer "NONET_L01_P004" (solid, remove dead copper, shelved, pour order 4): 74.986,50.004 74.986,0 0,0 0,50.005
IN on Top Layer "NONET_L01_P002" (solid, remove dead copper, shelved, pour order 2): 74.986,50.006 74.986,25.455 74.802,25.27 35.051,25.27 34.924,25.397 34.927,49.999
no net on Top Layer "NONET_L01_P001" (solid, remove dead copper, shelved, pour order 1): 74.986,0 74.986,24.551 74.802,24.736 35.051,24.736 34.924,24.609 34.926,0.007
GND on Bottom Layer "NONET_L04_P005" (solid, remove dead copper, shelved, pour order 5): 74.986,50.004 74.986,0 0,0 0,50.005
IN on Bottom Layer "NONET_L04_P000" (solid, remove dead copper, shelved, pour order 0): 74.988,50.009 74.988,25.458 74.803,25.273 35.052,25.273 34.925,25.4 34.928,50.002
no net on Bottom Layer "NONET_L04_P003" (solid, remove dead copper, shelved, pour order 3): 74.985,-0.003 74.985,24.549 74.8,24.733 35.049,24.733 34.922,24.606 34.925,0.004
GND on Layer 1 "NONET_L02_P006" (solid, remove dead copper, shelved, pour order 6): 74.986,50.004 74.986,0 0,0 0,50.005
GND on Layer 2 "NONET_L03_P007" (solid, remove dead copper, shelved, pour order 7): 74.986,50.004 74.986,0 0,0 0,50.005

## Keep-outs
Top Layer:
  region: 34.5,50 34.5,0 33.5,0 33.5,50
Bottom Layer:
  region: 34.5,50 34.5,0 33.5,0 33.5,50

## Other copper
Top Layer:
  region net OUT: 70.485,6.893 74.295,10.703 74.295,24.546 36.195,24.546 36.195,10.068 39.37,6.893 41.275,6.893 41.275,8.678 41.19,8.763 41.19,16.383 48.81,16.383 48.895,16.298 48.895,8.544 41.409,8.544 41.275,8.678 41.275,6.893 68.81,6.893 68.81,16.383 61.19,16.383 61.19,8.763 68.81,8.763 68.81,6.893
  region net IN: 70.485,43.18 74.295,39.37 74.295,25.527 36.195,25.527 36.195,40.005 39.37,43.18 41.275,43.18 41.275,41.395 41.19,41.31 41.19,33.69 48.81,33.69 48.895,33.775 48.895,41.529 41.409,41.529 41.275,41.395 41.275,43.18 68.81,43.18 68.81,33.69 61.19,33.69 61.19,41.31 68.81,41.31 68.81,43.18
Bottom Layer:
  region net OUT: 70.485,6.893 74.295,10.703 74.295,24.546 36.195,24.546 36.195,10.068 39.37,6.893 41.275,6.893 41.275,8.678 41.19,8.763 41.19,16.383 48.81,16.383 48.895,16.298 48.895,8.544 41.409,8.544 41.275,8.678 41.275,6.893 68.81,6.893 68.81,16.383 61.19,16.383 61.19,8.763 68.81,8.763 68.81,6.893
  region net IN: 70.485,43.18 74.295,39.37 74.295,25.527 36.195,25.527 36.195,40.005 39.37,43.18 41.275,43.18 41.275,41.395 41.19,41.31 41.19,33.69 48.81,33.69 48.895,33.775 48.895,41.529 41.409,41.529 41.275,41.395 41.275,43.18 68.81,43.18 68.81,33.69 61.19,33.69 61.19,41.31 68.81,41.31 68.81,43.18

## Silkscreen, mask and mechanical layers (free items; w line width, h text height)
Top Overlay:
  text "IN" at 41.69,44 h5
  text "IN" at 61.69,44 h5
  text "+" at 53.31,43.167 h5
  text "OUT" at 38.345,0.999 h5
  text "-" at 52.95,1 h5
  text "OUT" at 58.284,0.999 h5
Bottom Overlay:
  text "IN" at 49.96,43.996 h5
  text "IN" at 69.96,43.996 h5
  text "+" at 53.309,43.166 h5
  text "OUT" at 51.697,1 h5
  text "OUT" at 71.636,1 h5
  text "-" at 52.969,0.971 h5
Mechanical 1:
  circle w0.254: c65,37.5 r2.075
  circle w0.254: c45,37.5 r2.075
  circle w0.254: c65,12.5 r2.075
  circle w0.254: c45,12.5 r2.075
  lines w0.254: 0,0 75,0 75,50 0,50 0,0